# Allegro board HY_AD8436_V10_250412.brd
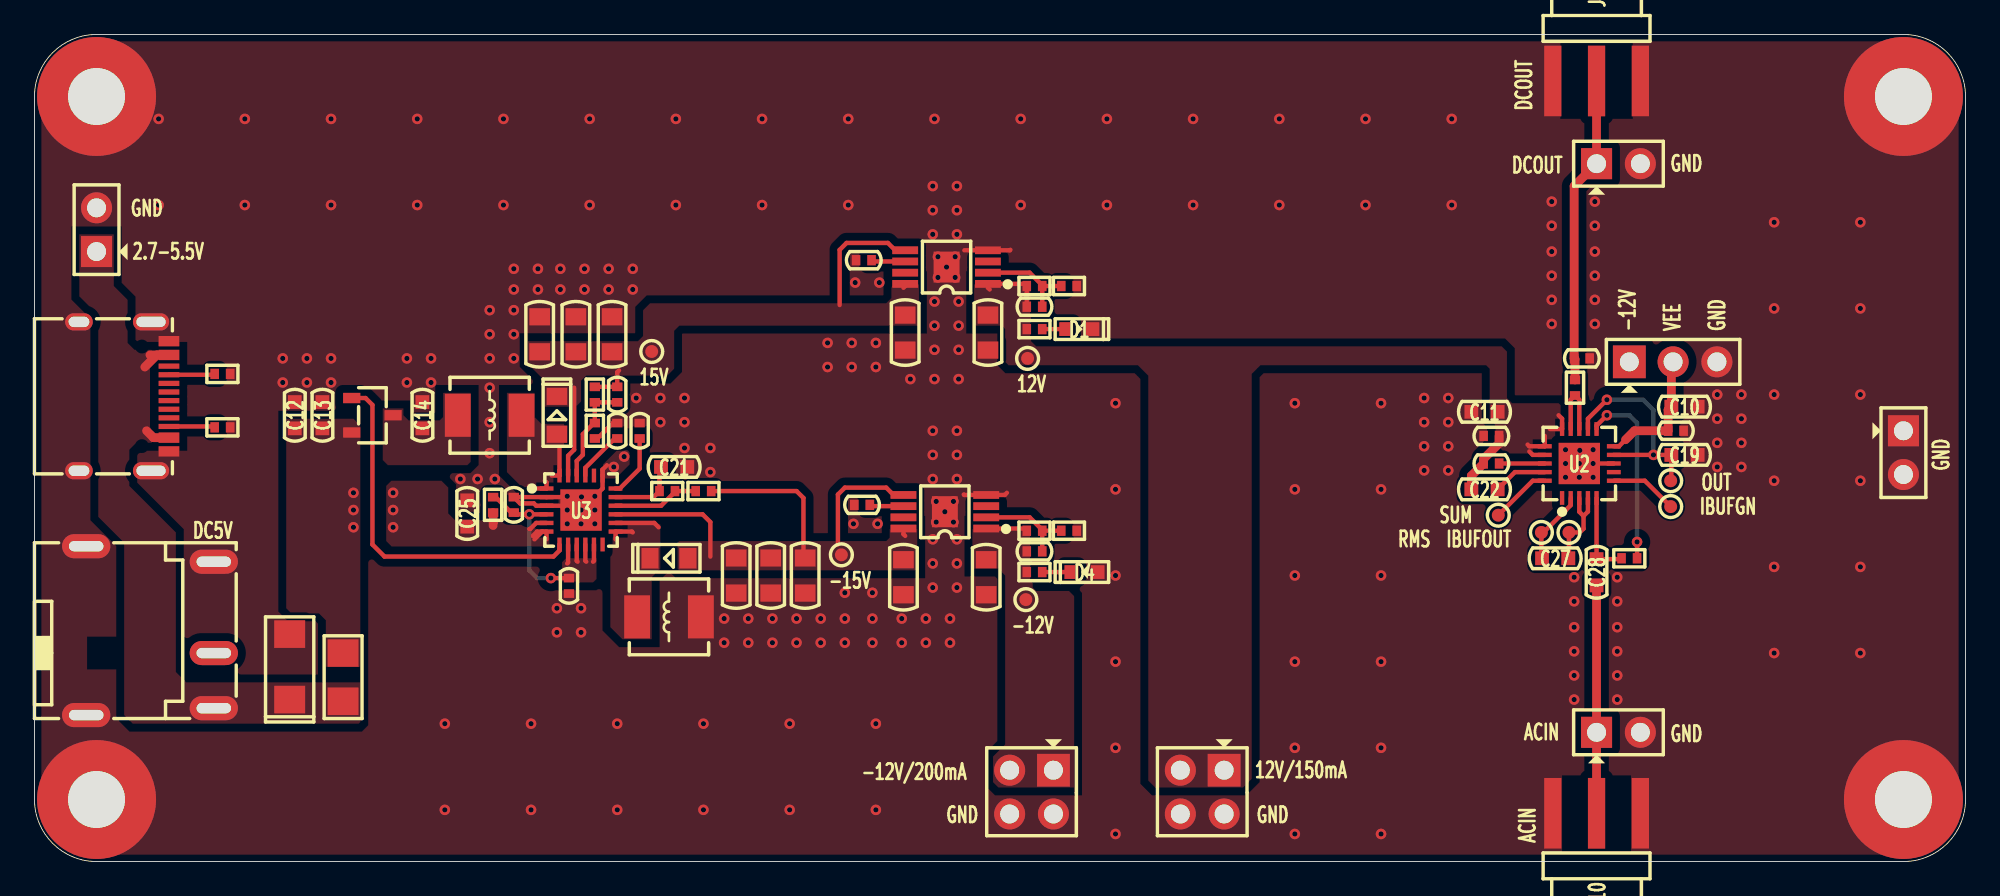
[diagram p0: board, top side]
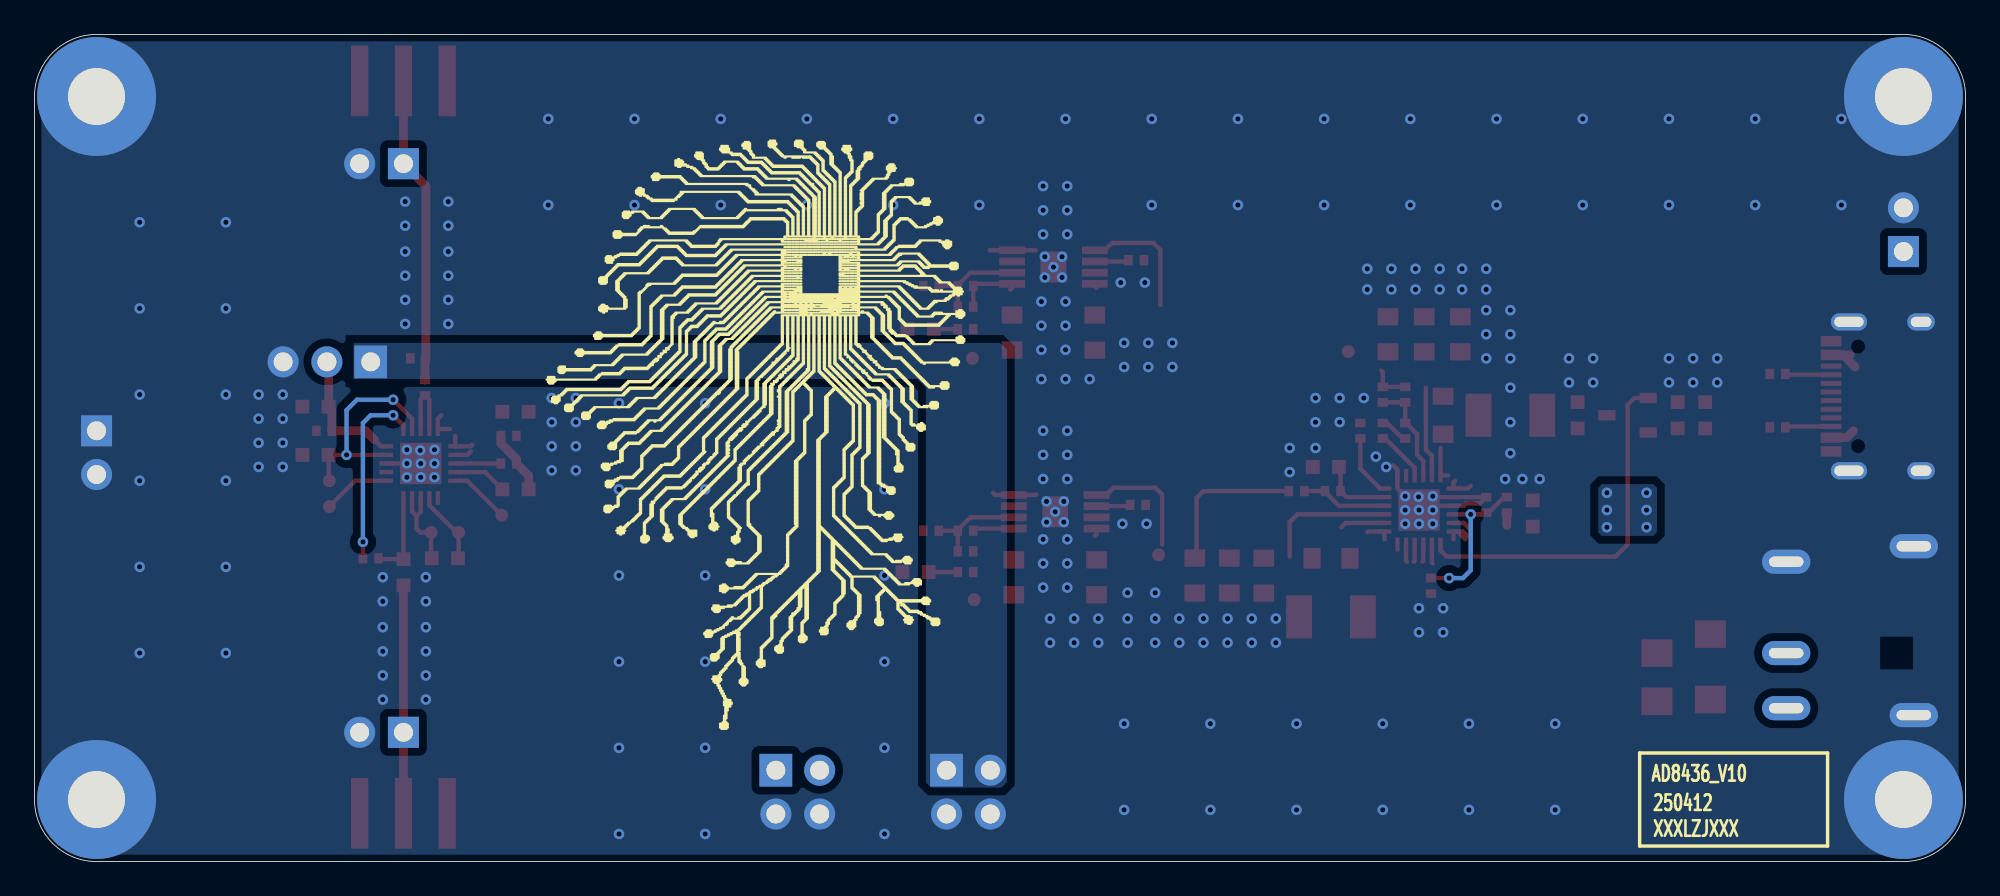
[diagram p1: board, bottom side, seen from below]

Outline 112 x 48 mm; copper layers: TOP, BOTTOM. Coordinates in mm from the lower left corner of the outline.
Outline path: 0,44.4 arc(1.05,46.95) 3.6,48 108.4,48 arc(110.95,46.95) 112,44.4 112,3.6 arc(110.95,1.05) 108.4,0 3.6,0 arc(1.05,1.05) 0,3.6 0,44.4

## Design rules (mm)
constraint set DEFAULT: min track width 0.152, pair gap 0.203

## Placement (name value [footprint] x y rotation side)
C1  10nF_50V  [C0402]  48.1 34.9 0 top
C2  10nF_50V  [C0402]  58 32.2 180 top
C3  22uF_25V  [C0805]  50.5 30.7 90 top
C4  22uF_25V  [C0805]  55.3 30.7 90 top
C5  22uF_25V  [C0805]  29.3 30.6 270 top
C6  22uF_25V  [C0805]  31.4 30.6 270 top
C7  22uF_25V  [C0805]  33.5 30.6 270 top
C8  100nF_50V/NI  [C0402]  89.75 29.2 180 top
C9  6.8pF_50V  [C0402]  33.8 27.1 90 top
C10  10uF_10V  [C0603]  95.7 26.4 180 top
C11  10uF_10V  [C0603]  84.1 26.1 0 top
C12  10uF_10V  [C0603]  15.1 25.9 270 top
C13  10uF_10V  [C0603]  16.7 25.9 270 top
C14  10uF_10V  [C0603]  22.5 25.9 270 top
C15  10nF_50V  [C0402]  33.8 25 270 top
C16  4.7nF_50V  [C0402]  35.1 25 270 top
C17  100nF_50V  [C0402]  95.2 25 180 top
C18  100nF_50V  [C0402]  84.5 24.7 0 top
C19  3.3uF_10V  [C0603]  95.7 23.6 180 top
C20  100nF_50V  [C0402]  84.5 23.1 0 top
C21  220nF_50V  [C0603]  37.1 22.9 180 top
C22  10uF_10V  [C0603]  84.1 21.6 0 top
C23  100nF_50V  [C0402]  27.8 20.7 270 top
C24  10nF_50V  [C0402]  48 20.7 0 top
C25  10uF_10V  [C0603]  25.1 20.2 270 top
C26  10nF_50V  [C0402]  58 18 180 top
C27  10uF_10V  [C0603]  88.2 17.6 0 top
C28  470nF_50V  [C0603]  90.6 16.79 270 top
C29  22uF_25V  [C0805]  40.7 16.6 90 top
C30  22uF_25V  [C0805]  42.7 16.6 90 top
C31  22uF_25V  [C0805]  44.7 16.6 90 top
C32  22uF_25V  [C0805]  50.4 16.5 90 top
C33  22uF_25V  [C0805]  55.2 16.5 90 top
C34  100nF_50V  [C0402]  31 16 90 top
D1  LED_GREEN  [LED0603]  60.6 30.9 0 top
D2  1N5819WS  [SOD323]  30.3 25.9 270 top
D3  1N5819WS  [SOD323]  36.8 17.6 0 top
D4  LED_GREEN  [LED0603]  60.9 16.8 180 top
D5  SS56F  [SMAF]  14.8 11.3 270 top
F1  0469005.WR  [FUSE1206]  17.9 10.7 90 top
J1  -  [SMA-KHD]  90.6 45.3 270 top
J2  -  [CN1X2-2P54-Z]  90.6 40.5 0 top
J3  -  [CN1X2-2P54-Z]  3.6 35.4 90 top
J4  -  [CN1X3-2P54-Z]  92.5 29 0 top
J5  -  [CN1X2-2P54-Z]  108.4 25 270 top
J6  DC-044B-5A-2.0  [DC-044B-5A-2R0]  4 12.1 0 top
J7  -  [CN1X2-2P54-Z]  90.6 7.5 0 top
J8  -  [CN2X2-2P54-Z]  59.1 5.3 180 top
J9  -  [CN2X2-2P54-Z]  69 5.3 180 top
J10  -  [SMA-KHD]  90.6 2.8 90 top
L1  FXL0420-4R7-M  [L0420]  26.4 25.9 0 top
L2  FXL0420-4R7-M  [L0420]  36.8 14.2 180 top
MH1  HOLE-M3/NI  [HOLE6R90X3R40]  3.6 44.4 0 top
MH2  HOLE-M3/NI  [HOLE6R90X3R40]  108.4 44.4 0 top
MH3  HOLE-M3/NI  [HOLE6R90X3R40]  3.6 3.6 0 top
MH4  HOLE-M3/NI  [HOLE6R90X3R40]  108.4 3.6 0 top
NOREF  -  []  0 0 90 top
NOREF#2  -  []  0 0 0 top
NOREF#3  -  []  0 0 0 top
NOREF#4  -  []  0 0 0 top
NOREF#5  -  []  0 0 90 top
NOREF#6  -  []  0 0 90 top
Q1  CJ3401A  [SOT23-3]  19.6 25.9 180 top
R1  912K  [R0402]  58 33.4 180 top
R2  100K  [R0402]  60 33.4 180 top
R3  10K  [R0402]  58 30.9 0 top
R4  5.1K  [R0402]  10.9 28.3 180 top
R5  0R  [R0402]  89.35 27.5 90 top
R6  975K  [R0402]  32.5 27.1 90 top
R7  5.1K  [R0402]  10.9 25.2 180 top
R8  85.8K  [R0402]  32.5 25 90 top
R9  104.8K  [R0402]  36.7 21.5 0 top
R10  1.3M  [R0402]  38.8 21.5 180 top
R11  100R  [R0402]  26.6 20.7 90 top
R12  93.1K  [R0402]  58 19.2 180 top
R13  10K  [R0402]  60 19.2 180 top
R14  10M  [R0402]  92.5 17.6 180 top
R15  10K  [R0402]  58 16.8 0 top
TP1  TP/NI  [TP-0R75]  35.8 29.6 0 top
TP2  TP/NI  [TP-0R75]  57.6 29.2 0 top
TP3  TP/NI  [TP-0R75]  94.9 22.1 0 top
TP4  TP/NI  [TP-0R75]  94.9 20.6 0 top
TP5  TP/NI  [TP-0R75]  84.9 20.1 0 top
TP6  TP/NI  [TP-0R75]  87.4 19.1 0 top
TP7  TP/NI  [TP-0R75]  89 19.1 0 top
TP8  TP/NI  [TP-0R75]  46.8 17.8 0 top
TP9  TP/NI  [TP-0R75]  57.5 15.2 0 top
U1  TPS7A4901DGNR  [HVSSOP8]  52.9 34.5 90 top
U2  AD8436ACPZ  [QFN20-4X4X0R5-2R4X2R4]  89.6 23.1 0 top
U3  TPS65130RGER  [QFN24-4X4X0R5-2R4X2R4]  31.7 20.4 270 top
U4  TPS7A3001DGNR  [HVSSOP8]  52.8 20.3 90 top
USB1  -  [TYPE-C-31-M-12]  7.8 27 270 top

## Library data of the parts
C1-C34 = CAP NP_2
D1 D4 = LED_2
D2 D3 D5 = DIODE13_9
F1 = FUSE
J1 J10 = SMA-KHD
J2 J3 J5 J7 = CONN RCPT 2
J4 = CONN RCPT 3
J6 = DC-044B-5A-2.0
J8 J9 = CONN RCPT 2x2
L1 L2 = IND_BEAD_0805_600OHM_1
MH1-MH4 = Hold_1
Q1 = MOS-P
R1-R15 = R_Generic
TP1-TP9 = TP
U1 = TPS7A4901DGNR
U2 = AD8436ACPZ
U3 = TPS65130RGER
U4 = TPS7A3001DGNR
USB1 = TYPE-C_16P

## Footprints (pads in the part's own frame, mm; a bottom-side part is the same pattern mirrored in y, then rotated)
C0402
  rect 0.5x0.6 smd: 1(-0.45,0) 2(0.45,0)
C0603
  rect 0.8x0.8 smd: 1(-0.762,0) 2(0.762,0)
C0805
  rect 1x1.2 smd: 1(-1.016,0) 2(1.016,0)
CN1X2-2P54-Z
  rect 1.8x1.8 hole 1.1: 1(0,0)
  round 1.8 hole 1.1: 2(2.54,0)
CN1X3-2P54-Z
  rect 1.9x1.9 hole 1.1: 1(0,0)
  round 1.8 hole 1.1: 2(2.54,0) 3(5.08,0)
CN2X2-2P54-Z
  rect 1.9x1.9 hole 1.1: 1(0,0)
  round 1.8 hole 1.1: 2(0,2.54) 3(2.54,0) 4(2.54,2.54)
DC-044B-5A-2R0
  oval 2.8x1.4 hole 2x0.6: 1(-1,6.2) 2(6.4,5.3) 3(6.4,0) 4(6.4,-3.2) 5(-1,-3.6)
FUSE1206
  rect 1.6x1.8 smd: 1(-1.4,0) 2(1.4,0)
HOLE6R90X3R40
  round 6.9 hole 3.3: 1(0,0)
HVSSOP8
  rect 0.45x1.5 smd: 1(-0.975,-2.4) 2(-0.325,-2.4) 3(0.325,-2.4) 4(0.975,-2.4) 5(0.975,2.4) 6(0.325,2.4) 7(-0.325,2.4) 8(-0.975,2.4)
  rect 1.8x1.5 smd: 9(0,0)
L0420
  rect 1.5x2.5 smd: 1(-1.85,0) 2(1.85,0)
LED0603
  rect 0.8x0.8 smd: 1(-0.762,0) 2(0.762,0)
QFN20-4X4X0R5-2R4X2R4
  rect 0.25x0.8 smd: 1(-1,-2) 2(-0.5,-2) 3(0,-2) 4(0.5,-2) 5(1,-2) 11(1,2) 12(0.5,2) 13(0,2) 14(-0.5,2) 15(-1,2)
  rect 0.8x0.25 smd: 6(2,-1) 7(2,-0.5) 8(2,0) 9(2,0.5) 10(2,1) 16(-2,1) 17(-2,0.5) 18(-2,0) 19(-2,-0.5) 20(-2,-1)
  rect 2.4x2.4 smd: 21(0,0)
QFN24-4X4X0R5-2R4X2R4
  rect 0.25x0.8 smd: 1(-1.25,-2) 2(-0.75,-2) 3(-0.25,-2) 4(0.25,-2) 5(0.75,-2) 6(1.25,-2) 13(1.25,2) 14(0.75,2) 15(0.25,2) 16(-0.25,2) 17(-0.75,2) 18(-1.25,2)
  rect 0.8x0.25 smd: 7(2,-1.25) 8(2,-0.75) 9(2,-0.25) 10(2,0.25) 11(2,0.75) 12(2,1.25) 19(-2,1.25) 20(-2,0.75) 21(-2,0.25) 22(-2,-0.25) 23(-2,-0.75) 24(-2,-1.25)
  rect 2.4x2.4 smd: 25(0,0)
R0402
  rect 0.5x0.6 smd: 1(-0.45,0) 2(0.45,0)
SMA-KHD
  rect 4.1x1 smd: 1(0,2.54) 2(0,0) 3(0,-2.54)
SMAF
  rect 1.6x1.8 smd: 1(-1.9,0) 2(1.9,0)
SOD323
  rect 1x1.2 smd: 1(1.1,0) 2(-1.1,0)
SOT23-3
  rect 1x0.6 smd: 1(1.2,-1) 2(1.2,1) 3(-1.2,0)
TP-0R75
  round 0.75 smd: 1(0,0)
TYPE-C-31-M-12
  rect 0.6x1.2 smd: 1(-3.2,0) 2(-2.4,0) 11(2.4,0) 12(3.2,0)
  rect 0.3x1.2 smd: 3(-1.75,0) 4(-1.25,0) 5(-0.75,0) 6(-0.25,0) 7(0.25,0) 8(0.75,0) 9(1.25,0) 10(1.75,0)
  oval 1x2.1 hole 0.6x1.7: 13(-4.32,-1.04) 14(4.32,-1.04)
  oval 1x1.6 hole 0.6x1.2: 15(-4.32,-5.22) 16(4.32,-5.22)

## Nets
GND: C1.1 C3.1 C4.1 C5.1 C6.1 C7.1 C8.1 C10.1 C11.1 C12.1 C13.1 C14.1 C15.1 C16.1 C17.1 C18.1 C19.1 C21.1 C23.1 C24.1 C25.1 C29.1 C30.1 C31.1 C32.1 C33.1 C34.1 D1.2(CATHODE) D4.1 D5.1 J1.1 J1.3 J2.2 J3.2 J4.3 J5.1 J5.2 J6.1 J6.2 J6.5 J7.2 J8.2 J8.4 J9.2 J9.4 J10.1 J10.3 L2.1 MH1.1 MH2.1 MH3.1 MH4.1 R2.1 R4.1 R7.1 R8.1 R13.1 U1.4 U1.9 U2.8 U2.21 U3.2 U3.3 U3.19 U3.25 U4.4 U4.9 USB1.1 USB1.12 USB1.13 USB1.14 USB1.15 USB1.16
VCC_5V: C12.2 C13.2 C25.2 F1.2 Q1.2(S) R11.1 U3.5 U3.6
VCC_+12V: C2.2 C4.2 C11.2 C18.2 C20.1 C22.1 J9.1 J9.3 R1.2 R3.1 TP2.1 U1.1(OUT) U2.15 U2.16 U2.17
VCC_+15V: C3.2 C5.2 C6.2 C7.2 C9.2 D2.2(ANODE_2) R6.2 TP1.1 U1.5 U1.8 U3.23
VCC_-12V: C26.2 C33.2 J4.1 J8.1 J8.3 R12.2 R15.1 TP9.1 U4.1(OUT)
VCC_-15V: C29.2 C30.2 C31.2 C32.2 D3.1 R10.1 TP8.1 U3.15 U4.5 U4.8
VCC_VIN: D5.2(ANODE_2) F1.1 J3.1 J6.4 USB1.2 USB1.11(VBUS2)
VEE: C10.2 C17.2 J4.2 U2.10(VEE)
AC_IN: C28.2 J7.1 J10.2
DC_OUT: C8.2 J1.2 J2.1 R5.2
N17556474: R4.2 USB1.4
N17556495: R7.2 USB1.10
N17558621: D1.1 R3.2
N17571182: D4.2(CATHODE) R15.2
N17594763: C14.2 L1.1 Q1.3
N17594773: D2.1 L1.2(B) U3.1 U3.24
N17594826: Q1.1 U3.7
N17594934: C23.2 C34.2 R11.2 U3.4 U3.8 U3.9 U3.10 U3.11
N17596105: C9.1 R6.1 R8.2 U3.22
N17597782: C15.2 U3.21
N17597785: D3.2(ANODE_2) L2.2(B) U3.13 U3.14
N17598991: C16.2 U3.18
N17600016: R9.2 R10.2 U3.16
N17600103: C21.2 R9.1 U3.17(VREF)
N17604118: C1.2 U1.6
N17604412: C2.1 R1.1 R2.2 U1.2
N17605380: C26.1 R12.1 R13.2 U4.2
N17605392: C24.2 U4.6
N17610127: C28.1 R14.2 U2.5
N17610163: R14.1 U2.11
N17610177: R5.1 U2.13 U2.14
N17610192: C19.2 TP3.1 U2.9 U2.12
N17610757: C27.2 TP7.1 U2.3 U2.4
N17610782: C27.1 TP6.1 U2.2
N17611065: C22.2 U2.19
N17611071: C20.2 U2.18
N17614337: TP4.1 U2.6
N17614419: TP5.1 U2.20

Pads without a net: J6 3; U1 3 7; U2 1 7; U3 12 20; U4 3 7; USB1 3 5 6 7 8 9

## Via types
v1: diameter 0.61, hole 0.305, TOP to BOTTOM, 260 vias

## Routing (per net, layer and track width the routed paths; a pad name or vN(x,y) marks a point on that pad's centre or on a via; arc(x,y) is an arc through that point)
GND: length 19.9
  TOP w0.254: 53.93,35.48 U1.4 56.58,35.48 56.6,35.5 ; R8.1 32.65,24.55 33.55,25.45 C15.1 ; U2.8 v1(90.4,23.1) v1(89.6,23.1) ; v1(31.7,20.4) 31.84,20.54 31.93,20.54 31.94,20.55 31.94,20.63 32.26,20.95 32.26,20.96 v1(32.5,21.2) 32.95,21.65 U3.19 32.95,22.75 33.2,23 ; 53.9,21.3 53.92,21.27 U4.4 56.27,21.27 56.4,21.4 ; 31.45,20.65 31.14,20.65 31.13,20.64 30.67,20.64 30.66,20.65 U3.3 29.1,20.65 28.96,20.79 28.16,20.79 C23.1 U3.2 30.85,21.15 v1(30.9,21.2) 31.45,20.65
  vias: v1(7.2,43.1) v1(7.2,38.1) v1(12.2,43.1) v1(12.2,38.1) v1(14.4,29.2) v1(14.4,27.8) v1(15.8,29.2) v1(15.8,27.8) v1(17.2,43.1) v1(17.2,38.1) v1(17.2,29.2) v1(17.2,27.8) v1(21.6,29.2) v1(21.6,27.8) v1(22.2,43.1) v1(22.2,38.1) v1(23,29.2) v1(23,27.8) v1(23.8,8) v1(23.8,3) v1(24.7,22.2) v1(25.7,22.2) v1(26.4,32) v1(26.4,30.6) v1(26.4,29.2) v1(26.4,27.5) v1(26.4,25.5) v1(26.4,23.7) v1(26.7,22.2) v1(27.2,43.1) v1(27.2,38.1) v1(27.8,34.4) v1(27.8,33.2) v1(27.8,32) v1(27.8,30.6) v1(27.8,29.2) v1(28.8,8) v1(28.8,3) v1(29.2,34.4) v1(29.2,33.2) v1(30.3,14.7) v1(30.3,13.3) v1(30.5,34.4) v1(30.5,33.2) v1(30.9,20.4) v1(30.9,19.6) v1(31.73,21.16) v1(31.7,19.6) v1(31.7,14.7) v1(31.7,13.3) v1(31.9,34.4) v1(31.9,33.2) v1(32.2,43.1) v1(32.2,38.1) v1(32.5,20.4) v1(32.5,19.6) v1(33.3,34.4) v1(33.3,33.2) v1(33.6,22.9) v1(33.8,8) v1(33.8,3) v1(34.2,23.5) v1(34.7,34.4) v1(34.7,33.2) v1(34.9,26.9) v1(36.3,26.9) v1(36.3,25.5) v1(37.2,43.1) v1(37.2,38.1) v1(37.7,26.9) v1(37.7,25.5) v1(37.7,24) v1(38.8,8) v1(38.8,3) v1(39.2,24) v1(39.2,22.6) v1(40,14.1) v1(40,12.7) v1(41.4,14.1) v1(41.4,12.7) v1(42.2,43.1) v1(42.2,38.1) v1(42.8,14.1) v1(42.8,12.7) v1(43.8,8) v1(43.8,3) v1(44.2,14.1) v1(44.2,12.7) v1(45.6,14.1) v1(45.6,12.7) v1(46,30.1) v1(46,28.7) v1(47,15.6) v1(47,14.1) v1(47,12.7) v1(47.2,43.1) v1(47.2,38.1) v1(47.4,30.1) v1(47.4,28.7) v1(47.5,19.6) v1(47.6,33.6) v1(48.6,15.6) v1(48.6,14.1) v1(48.6,12.7) v1(48.8,30.1) v1(48.8,28.7) v1(48.8,8) v1(48.8,3) v1(48.9,19.6) v1(49,33.6) v1(50.3,14.1) v1(50.3,12.7) v1(50.8,28) v1(51.7,14.1) v1(51.7,12.7) v1(52.1,39.2) v1(52.1,37.8) v1(52.1,36.4) v1(52.1,25) v1(52.1,23.6) v1(52.1,22.2) v1(52.1,18.7) v1(52.1,17.3) v1(52.1,15.9) v1(52.2,43.1) v1(52.2,32.5) v1(52.2,31.1) v1(52.2,29.7) v1(52.2,28) v1(52.3,20.9) v1(52.3,19.7) v1(52.4,35.1) v1(52.4,33.9) v1(52.8,20.3) v1(52.9,34.5) v1(53.1,14.1) v1(53.1,12.7) v1(53.3,20.9) v1(53.3,19.7) v1(53.4,35.1) v1(53.4,33.9) v1(53.5,39.2) v1(53.5,37.8) v1(53.5,36.4) v1(53.5,25) v1(53.5,23.6) v1(53.5,22.2) v1(53.5,18.7) v1(53.5,17.3) v1(53.5,15.9) v1(53.6,32.5) v1(53.6,31.1) v1(53.6,29.7) v1(53.6,28) v1(57.2,43.1) v1(57.2,38.1) v1(62.2,43.1) v1(62.2,38.1) v1(62.7,26.6) v1(62.7,21.6) v1(62.7,16.6) v1(62.7,11.6) v1(62.7,6.6) v1(62.7,1.6) v1(67.2,43.1) v1(67.2,38.1) v1(72.2,43.1) v1(72.2,38.1) v1(73.1,26.6) v1(73.1,21.6) v1(73.1,16.6) v1(73.1,11.6) v1(73.1,6.6) v1(73.1,1.6) v1(77.2,43.1) v1(77.2,38.1) v1(78.1,26.6) v1(78.1,21.6) v1(78.1,16.6) v1(78.1,11.6) v1(78.1,6.6) v1(78.1,1.6) v1(80.6,26.9) v1(80.6,25.5) v1(80.6,24.1) v1(80.6,22.7) v1(82,26.9) v1(82,25.5) v1(82,24.1) v1(82,22.7) v1(82.2,43.1) v1(82.2,38.1) v1(88,38.3) v1(88,36.9) v1(88,35.4) v1(88,34) v1(88,32.6) v1(88,31.2) v1(88.8,23.9) v1(88.8,23.1) v1(88.8,22.3) v1(89.3,16.5) v1(89.3,15.1) v1(89.3,13.6) v1(89.3,12.2) v1(89.3,10.8) v1(89.3,9.4) v1(89.63,23.86) v1(89.6,22.3) v1(90.4,23.9) v1(90.4,22.3) v1(90.5,38.3) v1(90.5,36.9) v1(90.5,35.4) v1(90.5,34) v1(90.5,32.6) v1(90.5,31.2) v1(91.8,16.5) v1(91.8,15.1) v1(91.8,13.6) v1(91.8,12.2) v1(91.8,10.8) v1(91.8,9.4) v1(97.6,27.1) v1(97.6,25.7) v1(97.6,24.3) v1(97.6,22.9) v1(99,27.1) v1(99,25.7) v1(99,24.3) v1(99,22.9) v1(100.9,37.1) v1(100.9,32.1) v1(100.9,27.1) v1(100.9,22.1) v1(100.9,17.1) v1(100.9,12.1) v1(105.9,37.1) v1(105.9,32.1) v1(105.9,27.1) v1(105.9,22.1) v1(105.9,17.1) v1(105.9,12.1)
VCC_5V: length 4
  TOP w0.254: 28.9,18.9 29.15,19.15 29.45,19.15 ; U3.5 29.1,19.65 28.75,19.3 28.7,19.3 ; 29.7,18.7 U3.6 29.45,19.15 ; 29.45,19.15 29,18.7 ; 26.7,19.7 26.75,19.65
  TOP w0.508: R11.1 26.6,19.5
  vias: v1(18.5,21.4) v1(18.5,20.4) v1(18.5,19.4) v1(20.8,21.4) v1(20.8,20.4) v1(20.8,19.4)
VCC_+12V: length 11.8
  TOP w0.254: 55.4,33.2 55.3,33.3 U1.1 57.42,33.52 R1.2 C2.2 ; 86.6,24.2 86.7,24.1 U2.16 87.6,24.7 ; U2.17 86.9,23.6 86.7,23.8 ; 87.9,25.1 U2.15 88.6,25.7 88.4,25.9
  TOP w0.508: C18.2 84.95,24.27 84.05,23.37 C20.1 83.34,22.39 C22.1
VCC_+15V: length 15.1
  TOP w0.254: 31.3,27.5 31.3,23.9 30.95,23.55 U3.23 ; 50.4,33.3 50.5,33.4 U1.8 ; 46.7,32.3 46.7,35.5 47.1,35.9 49.5,35.9 49.92,35.48 U1.5 ; R6.2 C9.2 33.8,28.4 33.9,28.5
VCC_-12V: length 2.4
  TOP w0.254: U4.1 57.42,19.32 R12.2
VCC_-15V: length 24.2
  TOP w0.254: U4.5 49.83,21.27 49.4,21.7 47,21.7 46.6,21.3 46.6,18.4 ; 50.5,18.9 50.4,19 U4.8 ; R10.1 44.2,21.5 44.6,21.1 44.6,17.72 C31.2 ; U3.15 38.75,20.15 39.2,19.7 39.2,17.7
VCC_VIN: length 3.6
  TOP w0.508: 7.1,29.4 6.7,29.4 ; 7.1,29.4 USB1.2 ; 7.1,29.4 6.4,28.7 ; USB1.11 6.9,24.6 6.5,25
VEE: length 7.6
  TOP w0.254: U2.10 91.9,24.1 92.28,24.48
  TOP w0.508: 92.28,24.48 92.8,25 C17.2 94.75,26.21 C10.2 94.94,28.9 J4.2
AC_IN: length 13.2
  TOP w0.508: C28.2 J7.1 J10.2
DC_OUT: length 17.9
  TOP w0.508: R5.2 89.35,29.15 C8.2 89.3,39.2 J2.1 J1.2
N17556474: length 2.7
  TOP w0.254: USB1.4 10.4,28.25 R4.2
N17556495: length 2.7
  TOP w0.254: R7.2 10.4,25.25 USB1.10
N17558621: length 1.4
  TOP w0.254: R3.2 D1.1
N17571182: length 1.7
  TOP w0.254: R15.2 D4.2
N17594773: length 3.6
  TOP w0.254: 30,22.4 U3.24 30.45,24 ; 28.7,21.8 28.85,21.65 U3.1 29.7,22 29.6,22.1
N17594826: length 21.1
  TOP w0.254: Q1.1 19.2,26.9 19.6,26.5 19.6,18.4 20.3,17.7 30.1,17.7 30.45,18.05 U3.7
N17594934: length 13.4
  TOP w0.254: 32,17.4 31.95,17.45 U3.10 ; U3.8 30.95,17.35 30.9,17.3 ; U3.11 32.45,17.45 32.4,17.4 ; C34.2 v1(29.95,16.45) ; U3.9 31.45,17.45 31.5,17.4 ; R11.2 26.75,21.15 27.65,20.25 C23.2 27.9,20.15 v1(28.7,20.15) U3.4
  BOTTOM w0.254: v1(28.7,20.15) 28.7,16.9 29.15,16.45 v1(29.95,16.45)
N17596105: length 6
  TOP w0.254: C9.1 R6.1 R8.2 32.45,25.45 31.81,24.8 31.81,23.61 31.45,23.25 U3.22
N17597782: length 3
  TOP w0.254: U3.21 31.95,22.85 33.65,24.55 C15.2
N17597785: length 4.1
  TOP w0.254: 34.7,19.1 34.65,19.15 U3.13 33.7,18.7 ; 36.2,19.4 35.95,19.65 U3.14
N17598991: length 3.6
  TOP w0.254: C16.2 35.1,22.8 33.95,21.65 U3.18
N17600016: length 5
  TOP w0.254: U3.16 36.35,20.65 37.15,21.45 R9.2 R10.2
N17600103: length 4.1
  TOP w0.254: C21.2 36.25,22.81 R9.1 35.9,21.15 U3.17
N17604118: length 2
  TOP w0.254: C1.2 48.62,34.83 U1.6
N17604412: length 5.8
  TOP w0.254: R1.1 R2.2 ; R1.1 C2.1 ; R1.1 58.45,33.45 57.72,34.17 U1.2
N17605380: length 5.9
  TOP w0.254: U4.2 57.72,19.98 58.45,19.25 R12.1 ; R12.1 R13.2 ; R12.1 C26.1
N17605392: length 2
  TOP w0.254: C24.2 48.52,20.62 U4.6
N17610127: length 5
  TOP w0.254: U2.5 C28.1 92,17.55 R14.2
N17610163: length 10.8
  TOP w0.254: R14.1 v1(92.95,18.55) ; v1(91.2,25.9) 90.6,25.3 U2.11
  BOTTOM w0.254: v1(91.2,25.9) 92.5,25.9 92.95,25.45 v1(92.95,18.55)
N17610177: length 4.1
  TOP w0.254: U2.13 89.6,26.8 R5.1 89.1,26.8 U2.14
N17610192: length 12.6
  TOP w0.254: U2.9 v1(93.9,23.6) C19.2 94.94,22.14 TP3.1 ; U2.12 90.1,25.7 v1(91.2,26.8)
  BOTTOM w0.254: v1(93.9,23.6) 93.9,26.2 93.3,26.8 v1(91.2,26.8)
N17610757: length 5.5
  TOP w0.254: C27.2 89,17.64 TP7.1 89.63,19.1 89.85,19.32 89.85,20.05 ; 89.85,20.05 89.6,20.3 U2.3 ; 89.85,20.05 90.1,20.31 U2.4
N17610782: length 4.3
  TOP w0.254: C27.1 87.4,17.64 TP6.1 87.52,19.1 89.1,20.68 U2.2
N17611065: length 3.2
  TOP w0.254: U2.19 85.86,22.6 C22.2
N17611071: length 2.6
  TOP w0.254: U2.18 C20.2
N17614337: length 3.9
  TOP w0.254: U2.6 93.4,22.1 TP4.1
N17614419: length 3.5
  TOP w0.254: U2.20 86.9,22.1 TP5.1

## Copper pours and planes (outline as drawn; the poured copper is in the pictures)
GND on TOP: 92.7,47.6 108.4,47.6 110.66,46.66 111.6,44.4 111.6,3.6 110.66,1.34 108.4,0.4 92.6,0.4 92.6,5 88.6,5 88.6,0.4 3.6,0.4 1.34,1.34 0.4,3.6 0.4,44.4 1.34,46.66 3.6,47.6 88.5,47.6 88.5,43.1 92.7,43.1 ; 5 cut-outs
GND on BOTTOM: 111.6,3.6 110.66,1.34 108.4,0.4 3.6,0.4 1.34,1.34 0.4,3.6 0.4,44.4 1.34,46.66 3.6,47.6 108.4,47.6 110.66,46.66 111.6,44.4
VCC_5V on TOP: 29.1,19.8 24.4,19.8 24,20.2 24,21.7 23.6,22.1 20.7,22.1 20.4,21.8 20.4,18.6 20.8,18.2 29.7,18.2 29.9,18.4 29.9,18.8 29.1,18.8
VCC_5V on TOP: 18.9,11.3 18.9,25.3 18.5,25.7 14.6,25.7 14.6,14.7 14.9,14.4 16.5,14.4 16.9,14 16.9,11.3
VCC_5V on BOTTOM: 21.1,21.9 21.3,21.7 21.3,19.1 21.1,18.9 18.1,18.9 17.9,19.1 17.9,21.7 18.1,21.9
VCC_+12V on TOP: 54.5,33.8 57.7,33.8 57.8,33.7 57.8,30.2 58.1,29.9 85.1,29.9 85.4,29.6 85.4,26.9 85.7,26.6 88.4,26.6 88.7,26.3 88.7,25.7 88.2,25.7 88.2,24.7 88,24.5 86.9,24.5 86.9,23.5 85.5,23.5 84.7,24.3 84.7,25.4 84.4,25.7 84.4,28.6 84.2,28.8 71.1,28.8 70.6,28.3 70.6,4.8 70.1,4.3 65,4.3 64.6,4.7 64.6,28.2 64,28.8 56.5,28.8 56.3,29 56.3,30.9 56.1,31.1 54.5,31.1
VCC_+15V on TOP: 28.6,30.2 35,30.2 35.3,30.5 35.3,32 35.7,32.4 49.4,32.4 49.7,32.7 49.7,33.8 51.3,33.8 51.3,31.1 37.4,31.1 37.1,30.8 37.1,28.6 36.7,28.2 32,28.2 31.7,27.9 31.7,26.7 31.4,26.4 29.6,26.4 29.6,27.9 28.6,28.9
VCC_-12V on TOP: 54.4,19.6 57.7,19.6 57.9,19.4 57.9,15.9 58.1,15.7 60,15.7 60.3,15.4 60.3,4.3 55.9,4.3 55.6,4.6 55.6,6.1 56.3,6.8 56.3,16.6 55.9,17 54.4,17
VCC_-12V on BOTTOM: 93.5,30.1 56,30.1 55.6,29.7 55.6,4.6 55.9,4.3 60,4.3 60.3,4.6 60.3,27.5 60.8,28 93.5,28
VCC_-15V on TOP: 37.4,16.9 51.2,16.9 51.2,19.6 49.6,19.6 49.6,18.8 49.4,18.6 37.4,18.6 37.3,18.5 37.3,17
VCC_VIN on TOP: 8.8,10.4 18.9,10.4 18.9,8.1 18.8,8 5.7,8 5.2,8.5 5.2,18.5 3.7,20 3.7,31.7 2.6,32.8 2.6,36.4 4.6,36.4 4.6,33.4 5.4,32.6 5.4,30.1 5.8,29.7 8.4,29.7 8.4,29.1 6.9,29.1 6.7,28.9 6.7,25.2 7,24.9 8.4,24.9 8.4,24.3 5.9,24.3 5.5,23.9 5.5,21.8 8.2,19.1 8.2,11
N17594763 on TOP: 20.2,26.3 20.2,23.3 20.5,23 25.1,23 25.3,23.2 25.3,27.2 23.7,27.2 23.7,25.8 23.5,25.6 21.7,25.6 21.4,25.9 21.4,26.3
N17594773 on TOP: 27.4,27.2 27.4,22.6 28.5,21.5 29.1,21.5 29.1,22 30.1,22 30.1,23 30.6,23 30.6,23.9 31,24.3 31,25.4 29.4,25.4 29,25.8 29,27.2
N17594934 on TOP: 30.6,16.2 32.4,16.2 32.6,16.4 32.6,17.6 30.8,17.6 30.6,17.4
N17597785 on TOP: 34.4,19.8 36.1,19.8 36.3,19.6 36.3,17 35.8,16.5 35.8,12.9 34.1,12.9 33.4,13.6 33.4,18.8 34.4,18.8

## Text on the board
Ref Des/Silkscreen Bottom: 250412 | XXXLZJXXX | AD8436_V10
Ref Des/Silkscreen Top: GND | 2.7-5.5V | DC5V | 15V | -15V | -12V/200mA | -12V | 12V | 12V/150mA | RMS | SUM | IBUFOUT | DCOUT | ACIN | IBUFGN | OUT | VEE
BODY_CENTER: FIGURE | FINISHED_SIZE | 0.3048 | 1.1 | 3.3 | 1.2x0.6 | 1.7x0.6 | 2.0x0.6 | DRILL CHART: TOP to BOTTOM | ALL UNITS ARE IN MILLIMETERS | DRILLED_SIZE | - | PLATED | QTY | 260 | 19 | 4 | 2 | 5 | 292 | TOTAL HOLES:
